# Altium PCB SteeringWheelSTM32F4.PcbDoc
Units mm, origin at the board's own origin, x right, y up, seen from the top; angles counter-clockwise.
Board outline 89 x 65 mm, 2 copper layers (Top Layer, Bottom Layer); 36 components, 33 nets, 212 pads, 45 vias.
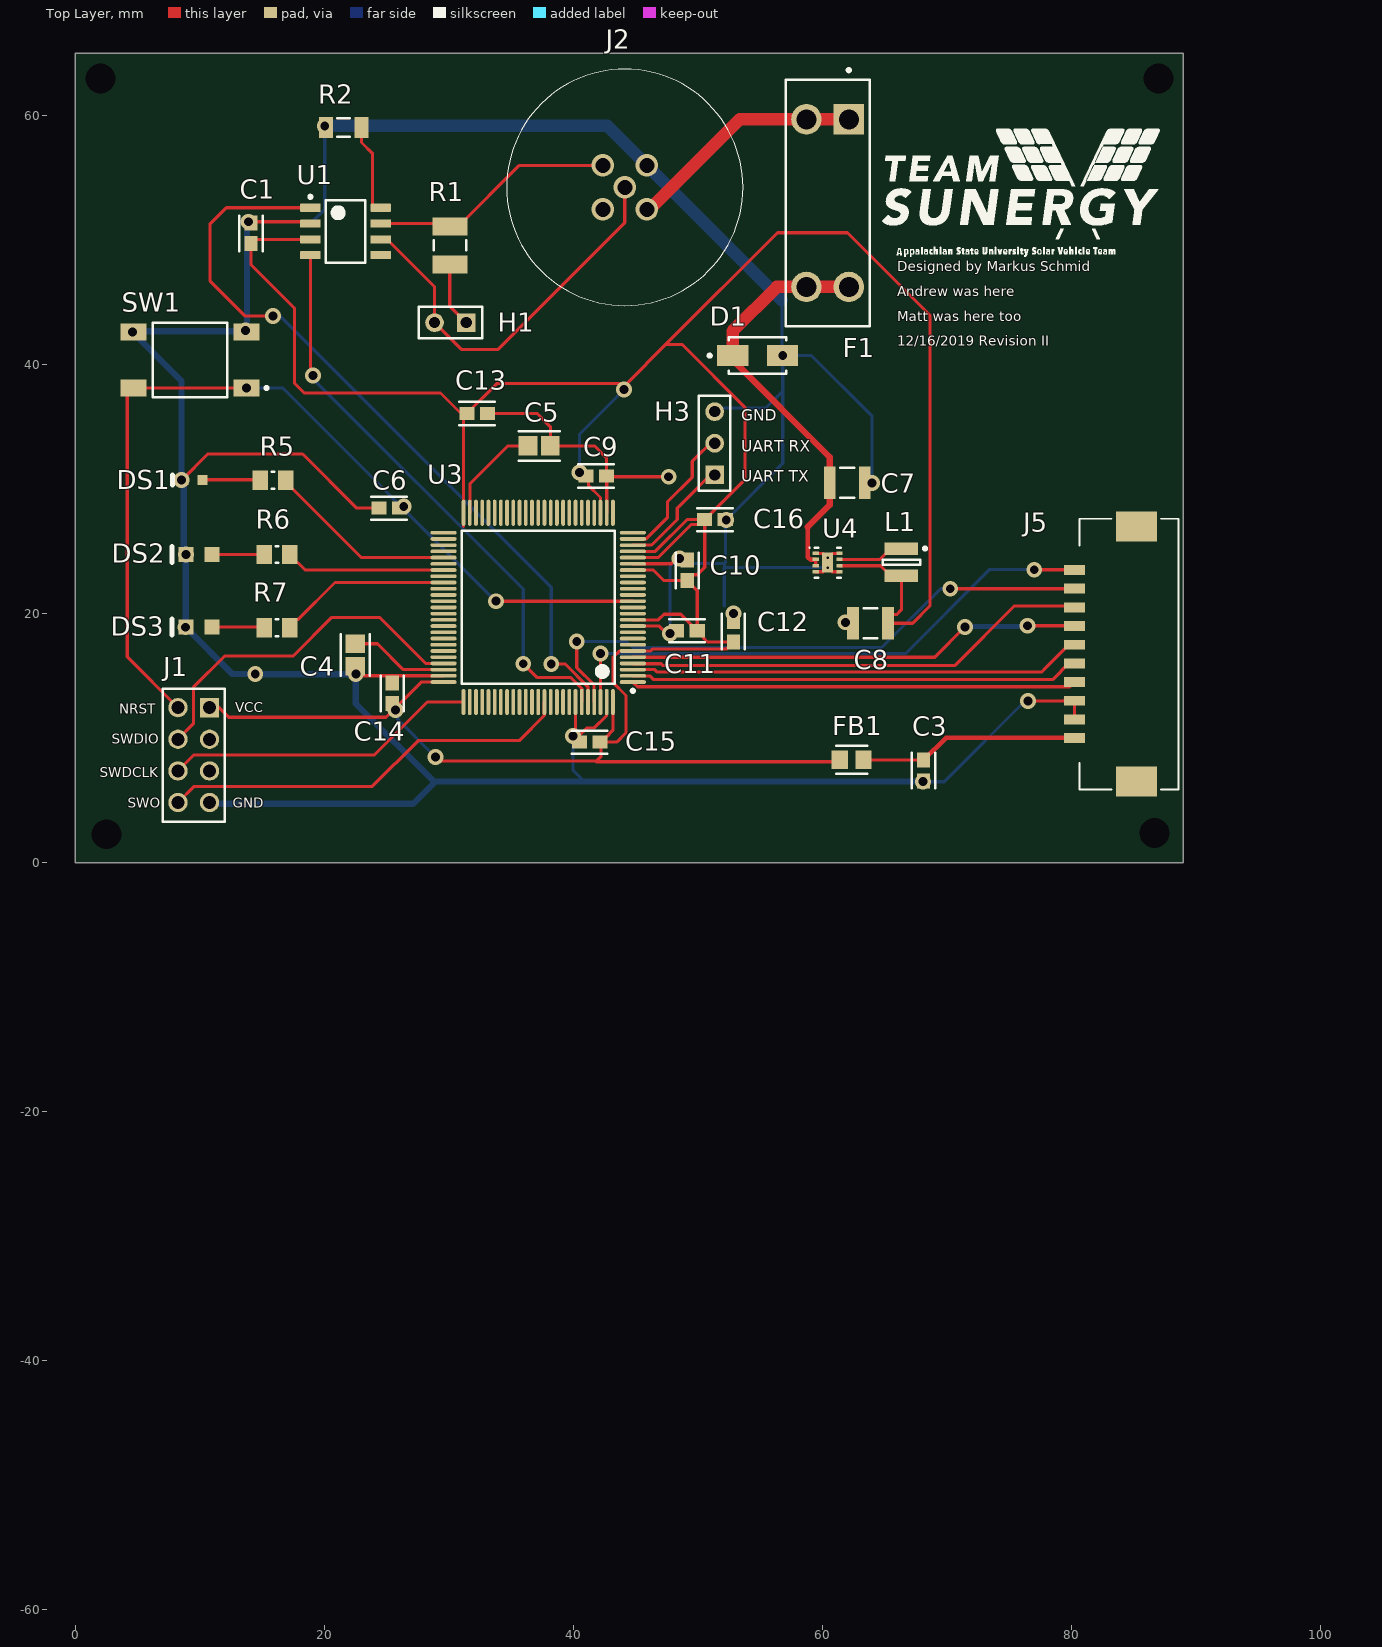
[diagram p0: Top Layer view]
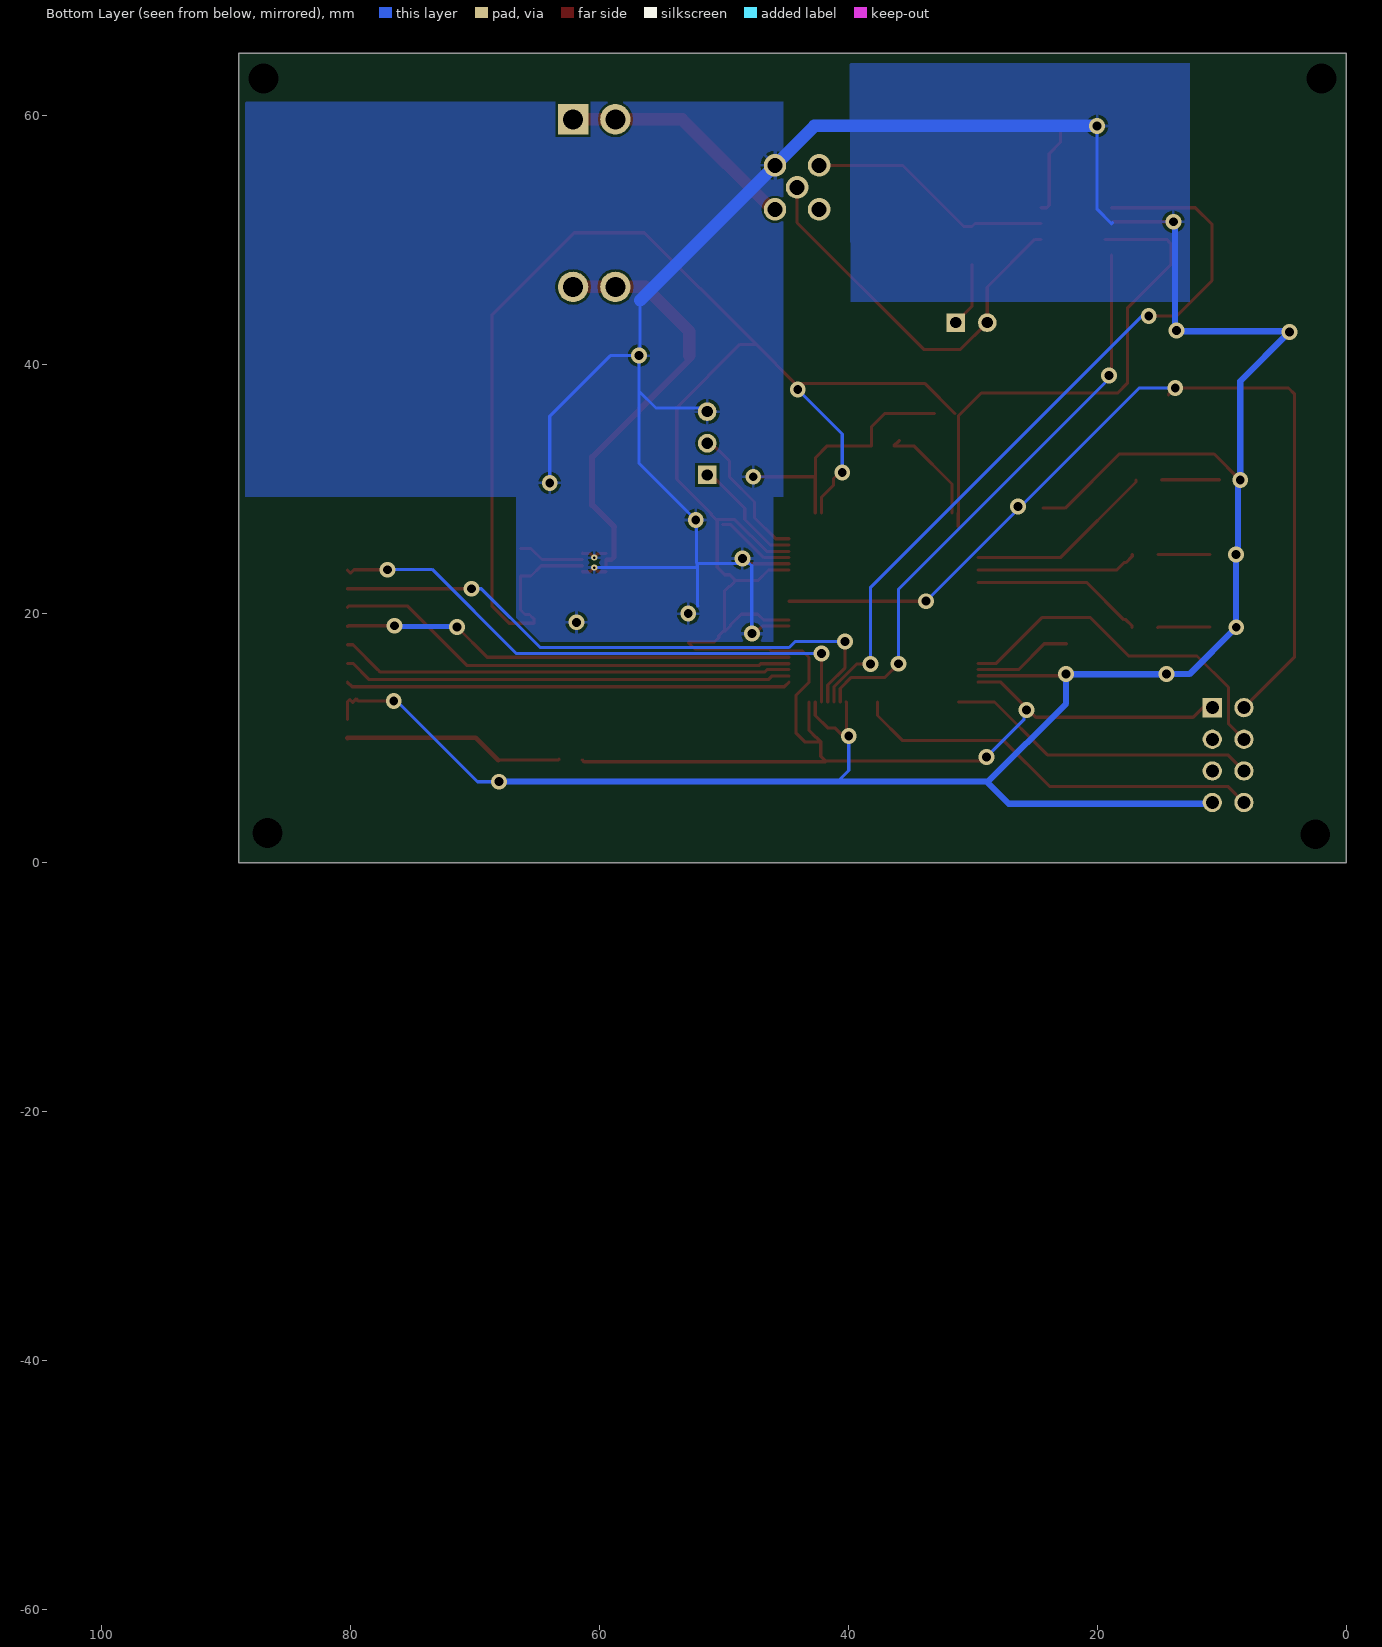
[diagram p1: Bottom Layer view, seen from below]

## Layer stack, top to bottom
Top Solder: solder mask 0.0102, Solder Resist, Dk 3.5
Top Layer: signal copper 0.0356
Dielectric 1: dielectric 0.32, FR-4, Dk 4.8
Bottom Layer: signal copper 0.0356
Bottom Solder: solder mask 0.0102, Solder Resist, Dk 3.5

## Board outline
0,0 0,65 89,65 89,0

## Design rules (kind name [scope] priority, off if disabled: settings)
Clearance [All] p1: gap=0.2 ignorepadtopadclearanceinfootprint=TRUE except(0: Arc-Hole Track-Hole SMDPad-Hole THPad-Hole Via-Hole Fill-Hole Poly-Hole Region-Hole Text-Hole)
MinimumSolderMaskSliver MinimumSolderMaskSliver_1 [HasFootprint('DSG8-1600X900TP') vs HasFootprint('DSG8-1600X900TP')] p1: minsoldermaskwidth=0
MinimumSolderMaskSliver [All] p2: minsoldermaskwidth=0.2
PolygonConnect [All] p1: connectstyle=Relief reliefconductorwidth=0.254 reliefentries=4 polygonreliefangle="90 Angle" airgapwidth=0.254
RoutingVias [All] p1: holewidth=0.711 width=1.27 viastyle="Through Hole" minholewidth=0.711 minwidth=1.27 maxholewidth=0.711 maxwidth=1.27
SilkToSolderMaskClearance [IsPad] p1: minsilkscreentomaskgap=0.2 clearancetoexposedcopper=TRUE
SolderMaskExpansion [All] p1: expansion=0.102
Width [All] p1: maxlimit=1 minlimit=0.254 preferedwidth=0.254 minimp=50.000000 maximp=50.000000 favimp=50.000000
28 further rules are at their usual default settings.

## Classes and differential pairs
net class Power: +12 NetF1_1
component class User_LEDs: DS1 DS2 DS3 R5 R6 R7
component class Power_Supply: C7 C8 C9 C10 C11 C12 C13 C14 C15 C16 L1 U4
component class MCU: "C1 0.1 uF" C4 C5 "C5 100nF" C6 "C6 100nF" "C7 100nF" "C8 0.1uF" "C9 0.1uF" "C10 0.1uF" SW1 U3
component class Communications: C1 D1 F1 H1 H3 J1 J2 R1 R2 U1
component class Connector: C3 FB1 J5

## Components (designator, comment, footprint, x,y, rotation, side; value= is the part's Value field where it differs from the comment)
C1 "100nF" Kemet_C0603_IPC_A 14.1,50.551 r90 top
C3 "C0603C104K5RACTU" Kemet_C0603_IPC_A 68.125,7.399 r270 top
C4 "2.2uF" Yageo_CC0805-0.85_IPC_A 22.475,16.675 r90 top
C5 "2.2uF" Yageo_CC0805-0.85_IPC_A 37.25,33.475 r180 top
C6 "100nF" Kemet_C0603_IPC_A 25.2,28.475 r180 top
C7 "CAP 22uF 16V X7R 1210(3225)" CAPC1210(3225)280_L 62,30.5 r180 top value=22uF
C8 "CAP 22uF 16V X7R 1210(3225)" CAPC1210(3225)280_L 63.875,19.225 r0 top value=22uF
C9 "100nF" Kemet_C0603_IPC_A 41.825,31.058 r180 top
C10 "100nF" Kemet_C0603_IPC_A 49.15,23.475 r270 top
C11 "100nF" Kemet_C0603_IPC_A 49.125,18.625 r0 top
C12 "100nF" Kemet_C0603_IPC_A 52.85,18.55 r270 top
C13 "100nF" Kemet_C0603_IPC_A 32.275,36.075 r0 top
C14 "100nF" Kemet_C0603_IPC_A 25.45,13.6 r90 top
C15 "100nF" Kemet_C0603_IPC_A 41.3,9.675 r180 top
C16 "100nF" Kemet_C0603_IPC_A 51.374,27.55 r180 top
D1 "S1J-13-F" Diodes_SMA_0 54.8,40.725 r0 top
DS1 "HSMS-C190" AVAG-HSMX-C190_V 9.45,30.75 r180 top
DS2 "HSMD-C170" AVAG-HSMX-C170_V 9.925,24.75 r180 top
DS3 "HSMG-C170" AVAG-HSMX-C170_V 9.925,18.925 r180 top
F1 "3557-2" Keystone_3557-2_0 60.425,52.975 r270 top
FB1 "2508056017Y2" Fair-Rite_250805_0 62.35,8.25 r0 top
H1 "Header 0" HDR1X2 31.39,43.375 r180 top
H3 "Header 3" HDR1X3 51.35,31.145 r90 top
J1 "SSW-104-02-T-D" SMTC-SSW-104-02-X-D 10.775,12.445 r270 top
J2 "1542761" 1542761 44.132,54.243 r45 top
J5 "Part Number: 1-292227-0" CON10_1X10_DRH_H 80.25,23.5 r270 top value=Value
L1 "SRN3015-2R2M" BOUR-SRN3015-2_V 66.35,24.125 r270 top
R1 "ERJ-14YJ121U" RESC3225X70X50ML20T20 30.075,49.575 r270 top
R2 "ERJ-8GEYJ103V" RESC3216X70X50NL05T20 21.55,59.05 r180 top
R5 "CRCW0805165RFKEA" RESC2013X50X30ML20T20 15.875,30.725 r0 top
R6 "CRCW0805165RFKEA" RESC2013X50X30ML20T20 16.175,24.75 r0 top
R7 "CRCW0805165RFKEA" RESC2013X50X30ML20T20 16.2,18.875 r0 top
SW1 "TL3301AF260QG" ESWI-TL3301AF260QG_V 9.2,40.375 r180 top
U1 "SN65HVD230D" D0008A_M 21.7,50.7 r0 top
U3 "STM32F407VGT6" STM-LQFP100_M 37.175,20.5 r180 top
U4 "TPS62172DSGR" DSG8-1600X900TP 60.425,24.1 r0 top

## Footprints (in the part's own frame and the unit in brackets; to place one, negate y for a bottom-side part, rotate by r counter-clockwise, add the part's x,y. Pads: shape width x height; smd on the part's side, far side on the other; paste and mask are expansions set on the pad)
1542761 [mm]
  round 1.8 hole 1.2: 1(-2.5,0) 2(0,-2.5) 3(2.5,0) 4(0,2.5) 5(0,0)
  silkscreen extent -9.5,-9.5 9.5,9.5
AVAG-HSMX-C170_V [mm] "SMD, 2-Leads, Body 2x1.25mm, Height 0.8mm"
  rect 1.2x1.2 smd: 1(-1.05,0) 2(1.05,0)
  silkscreen extent 2.15,-0.63 2.15,0.63, body extent -1,-0.63 1,0.63, height 0.8
AVAG-HSMX-C190_V [mm] "SMD, 2-Leads, Body 1.6x0.8mm, Height 0.9mm"
  rect 0.8x0.8 smd: 1(-0.75,0) 2(0.75,0)
  silkscreen extent 1.65,-0.4 1.65,0.4, body extent -0.8,-0.4 0.8,0.4, height 0.9
BOUR-SRN3015-2_V [mm] "SMD, 2-Leads, Body 3x3mm, Height 1.5mm"
  rect 1x2.7 smd: 1(-1.1,0) 2(1.1,0)
  silkscreen extent -1.22,-1.5 0.2,2.03, body extent -1.5,-1.5 1.5,1.5, height 1.5
CAPC1210(3225)280_L [mm] "Chip Capacitor, Body 3.2x2.5mm, Height 2.8mm, IPC High Density"
  rect 0.95x2.6 smd: 1(-1.4,0) 2(1.4,0)
  silkscreen extent -0.55,-1.2 0.55,1.2, body extent -1.7,-1.4 1.7,1.4, height 2.8
CON10_1X10_DRH_H [mm]
  rect 0.8x1.7 smd: 1(0,0) 2(1.5,0) 3(3,0) 4(4.5,0) 5(6,0) 6(7.5,0) 7(9,0) 8(10.5,0) 9(12,0) 10(13.5,0)
  rect 2.413x3.302 smd: 11(-3.499,4.978) 12(16.999,4.978)
  silkscreen extent -4.12,0.41 17.62,8.36, body extent 0,0 0.25,0.25, height 0.25
D0008A_M [mm] "SOIC, 8-Leads, Body 5x4mm, Pitch 1.27mm, IPC Low Density"
  rrect15% 1.65x0.65 smd: 1(-2.825,1.905) 2(-2.825,0.635) 3(-2.825,-0.635) 4(-2.825,-1.905) 5(2.825,-1.905) 6(2.825,-0.635) 7(2.825,0.635) 8(2.825,1.905)
  silkscreen extent -2.95,-2.5 1.6,2.9, body extent -3,-2.45 3,2.45, height 1.63
Diodes_SMA_0 [mm]
  rect 2.5x1.7 smd paste+0 mask+0: 1(-2,0) 2(2,0)
  silkscreen extent -3.97,-1.46 2.3,1.46, body extent -3.35,-1.56 3.35,1.56, height 0.25
DSG8-1600X900TP [mm] "SON, 8-Leads, Body 2x2mm, Pitch 0.5mm, Thermal Pad 1.6x0.9mm, TI Recommended"
  rect 0.5x0.28 smd paste-0.14 mask+0.07: 1(-0.95,0.75) 2(-0.95,0.25) 3(-0.95,-0.25) 4(-0.95,-0.75) 5(0.95,-0.75) 6(0.95,-0.25) 7(0.95,0.25) 8(0.95,0.75)
  rect 0.9x1.6 smd paste-0.45 mask+0.07: 9(0,0)
  silkscreen extent -1.5,-1.2 1.05,1.25, body extent -1.05,-1.05 1.05,1.05, height 0.8
ESWI-TL3301AF260QG_V [mm] "SMD, 4-Leads, Body 6x6mm"
  rect 2.1x1.4 smd: 1(-4.55,2.25) 2(4.55,2.25) 3(-4.55,-2.25) 4(4.55,-2.25)
  silkscreen extent -6.27,-3 3,3, body extent -3,-3 3,3, height 5.3
Fair-Rite_250805_0 [mm]
  rect 1.3x1.5 smd paste+0 mask+0: 1(-0.95,0) 2(0.95,0)
  silkscreen extent -1.25,-1.12 1.25,1.13
HDR1X2 [mm] "Connector; Header; 2 Position"
  rect 1.5x1.5 hole 0.9: 1(0,0)
  round 1.5 hole 0.9: 2(2.54,0)
  silkscreen extent -1.27,-1.27 3.81,1.27
HDR1X3 [mm] "Connector; Header; 3 Position"
  rect 1.5x1.5 hole 0.9: 1(0,0)
  round 1.5 hole 0.9: 2(2.54,0) 3(5.08,0)
  silkscreen extent -1.27,-1.27 6.35,1.27
Kemet_C0603_IPC_A [mm]
  rect 1.206x1.058 smd paste+0 mask+0: 1(-0.826,0) 2(0.826,0)
  silkscreen extent -1.43,-0.93 1.43,0.93
Keystone_3557-2_0 [mm]
  rect 2.45x2.45 hole 1.6 paste-1000 mask+0: 1(-6.735,1.7)
  round 2.45 hole 1.6 paste-1000 mask+0: 2(6.735,1.7) 3(-6.735,-1.7) 4(6.735,-1.7)
  silkscreen extent -10.8,-3.36 9.9,3.36, body extent -10.08,-3.54 10.08,3.54, height 0.25
RESC2013X50X30ML20T20 [mm] "Chip Resistor, 2-Leads, Body 2.00x1.25mm, IPC Low Density"
  rect 1.25x1.55 smd: 1(-1.025,0) 2(1.025,0)
  silkscreen extent -0.1,-0.68 0.1,0.67, body extent -1.1,-0.73 1.1,0.73, height 0.5
RESC3216X70X50NL05T20 [mm] "Chip Resistor, 2-Leads, Body 3.20x1.60mm, IPC Medium Density"
  rect 1.1x1.65 smd: 1(-1.425,0) 2(1.425,0)
  silkscreen extent -0.5,-0.72 0.5,0.73, body extent -1.63,-0.82 1.62,0.82, height 0.7
RESC3225X70X50ML20T20 [mm] "Chip Resistor, 2-Leads, Body 3.20x2.50mm, IPC Low Density"
  rect 1.45x2.8 smd: 1(-1.525,0) 2(1.525,0)
  silkscreen extent -0.4,-1.3 0.4,1.3, body extent -1.7,-1.35 1.7,1.35, height 0.7
SMTC-SSW-104-02-X-D [mm] "SQ Post Socket, 2x4 Pins, Vertical, 2.54mm Pitch, Female"
  rect 1.55x1.55 hole 1.04: 1(0,0)
  round 1.55 hole 1.04: 2(0,-2.54) 3(2.54,0) 4(2.54,-2.54) 5(5.08,0) 6(5.08,-2.54) 7(7.62,0) 8(7.62,-2.54)
  silkscreen extent -1.52,-3.75 9.15,1.2, body extent -1.52,-3.75 9.14,1.21, height 8.51
STM-LQFP100_M [mm] "Thin QFP, 100-Leads, Body 14x14mm, Pitch 0.5mm, IPC Low Density"
  oval 2.1x0.3 smd: 1(-7.6,6) 2(-7.6,5.5) 3(-7.6,5) 4(-7.6,4.5) 5(-7.6,4) 6(-7.6,3.5) 7(-7.6,3) 8(-7.6,2.5) 9(-7.6,2) 10(-7.6,1.5) 11(-7.6,1) 12(-7.6,0.5) 13(-7.6,0) 14(-7.6,-0.5) 15(-7.6,-1) 16(-7.6,-1.5) 17(-7.6,-2) 18(-7.6,-2.5) 19(-7.6,-3) 20(-7.6,-3.5) 21(-7.6,-4) 22(-7.6,-4.5) 23(-7.6,-5) 24(-7.6,-5.5) 25(-7.6,-6) 51(7.6,-6) 52(7.6,-5.5) 53(7.6,-5) 54(7.6,-4.5) 55(7.6,-4) 56(7.6,-3.5) 57(7.6,-3) 58(7.6,-2.5) 59(7.6,-2) 60(7.6,-1.5) 61(7.6,-1) 62(7.6,-0.5) 63(7.6,0) 64(7.6,0.5) 65(7.6,1) 66(7.6,1.5) 67(7.6,2) 68(7.6,2.5) 69(7.6,3) 70(7.6,3.5) 71(7.6,4) 72(7.6,4.5) 73(7.6,5) 74(7.6,5.5) 75(7.6,6)
  oval 0.3x2.1 smd: 26(-6,-7.6) 27(-5.5,-7.6) 28(-5,-7.6) 29(-4.5,-7.6) 30(-4,-7.6) 31(-3.5,-7.6) 32(-3,-7.6) 33(-2.5,-7.6) 34(-2,-7.6) 35(-1.5,-7.6) 36(-1,-7.6) 37(-0.5,-7.6) 38(0,-7.6) 39(0.5,-7.6) 40(1,-7.6) 41(1.5,-7.6) 42(2,-7.6) 43(2.5,-7.6) 44(3,-7.6) 45(3.5,-7.6) 46(4,-7.6) 47(4.5,-7.6) 48(5,-7.6) 49(5.5,-7.6) 50(6,-7.6) 76(6,7.6) 77(5.5,7.6) 78(5,7.6) 79(4.5,7.6) 80(4,7.6) 81(3.5,7.6) 82(3,7.6) 83(2.5,7.6) 84(2,7.6) 85(1.5,7.6) 86(1,7.6) 87(0.5,7.6) 88(0,7.6) 89(-0.5,7.6) 90(-1,7.6) 91(-1.5,7.6) 92(-2,7.6) 93(-2.5,7.6) 94(-3,7.6) 95(-3.5,7.6) 96(-4,7.6) 97(-4.5,7.6) 98(-5,7.6) 99(-5.5,7.6) 100(-6,7.6)
  silkscreen extent -7.73,-6.15 6.15,6.82, body extent -7,-7 7,7, height 1.6
Yageo_CC0805-0.85_IPC_A [mm]
  rect 1.505x1.556 smd paste+0 mask+0: 1(-0.901,0) 2(0.901,0)
  silkscreen extent -1.65,-1.18 1.65,1.18, body extent -2.15,-1.28 2.15,1.28, height 0.25

## Part data
C1 C6 C9 C10 C11 C12 C13 C14 C15 C16: library part C0603C104K5RACTU, "CAP CER 0.1UF 100NF 50V X7R 0603 C0603C104K5RACTU"
C4: library part CC0805KKX7R6BB225, "2.2UF CC0805KKX7R6BB225", Case/Package=0805, Case Code (Metric)=2012, Dielectric=X7R, Dielectric Material=Ceramic, Manufacturer 1=Yageo, Max Operating Temperature=125°C, Min Operating Temperature=-55°C, Package Quantity=1, Supplier Part Number 1=311-1368-1-ND, Tolerance=10%, Voltage Rating=10V, Capacitance=2.2uF, Case Code (Imperial)=0805, ComponentLink1Description=https://datasheet.ciiva.com/5789/1734573-5789888.pdf?src-supplier=Farnell, ComponentLink1URL=https://datasheet.ciiva.com/5789/1734573-5789888.pdf?src-supplier=Farnell, ComponentLink2Description=https://datasheet.ciiva.com/161/mlccorderingcode-161925.pdf?src-supplier=Digi-Key, ComponentLink2URL=https://datasheet.ciiva.com/161/mlccorderingcode-161925.pdf?src-supplier=Digi-Key, ComponentLink3Description=https://datasheet.ciiva.com/15189/getdatasheetpartid-315916-15189205.pdf?src-supplier=Verical, ComponentLink3URL=https://datasheet.ciiva.com/15189/getdatasheetpartid-315916-15189205.pdf?src-supplier=Verical, ComponentLink4Description=https://datasheet.ciiva.com/161/mlccorderingcode-161926.pdf?src-supplier=Digi-Key, ComponentLink4URL=https://datasheet.ciiva.com/161/mlccorderingcode-161926.pdf?src-supplier=Digi-Key, ComponentLink5Description=https://datasheet.ciiva.com/161/mlccorderingcode-161927.pdf?src-supplier=Digi-Key, ComponentLink5URL=https://datasheet.ciiva.com/161/mlccorderingcode-161927.pdf?src-supplier=Digi-Key, ComponentLink6Description=https://datasheet.ciiva.com/8033/70765-8033975.pdf?src-supplier=Element14, ComponentLink6URL=https://datasheet.ciiva.com/8033/70765-8033975.pdf?src-supplier=Element14, ComponentLink7Description=https://datasheet.ciiva.com/8033/1734573-8033977.pdf?src-supplier=Element14, ComponentLink7URL=https://datasheet.ciiva.com/8033/1734573-8033977.pdf?src-supplier=Element14, ComponentLink8Description=https://datasheet.ciiva.com/13208/upy-gphc-x7r-6-3v-to-50v-8-12304-13208665.pdf?src-supplier=Mouser, ComponentLink8URL=https://datasheet.ciiva.com/13208/upy-gphc-x7r-6-3v-to-50v-8-12304-13208665.pdf?src-supplier=Mouser, ComponentLink9Description=https://datasheet.ciiva.com/8033/1734573-8033979.pdf?src-supplier=Element14, ComponentLink9URL=https://datasheet.ciiva.com/8033/1734573-8033979.pdf?src-supplier=Element14, ComponentLink10Description=https://datasheet.ciiva.com/16624/upy-gphc-x7r-6-3v-to-50v-8-16624651.pdf?src-supplier=Avnet+Europe, ComponentLink10URL=https://datasheet.ciiva.com/16624/upy-gphc-x7r-6-3v-to-50v-8-16624651.pdf?src-supplier=Avnet+Europe, ComponentLink11Description=https://datasheet.ciiva.com/11587/upy-gphc-x7r-6-3v-to-50v-8-11587213.pdf?src-supplier=Avnet, ComponentLink11URL=https://datasheet.ciiva.com/11587/upy-gphc-x7r-6-3v-to-50v-8-11587213.pdf?src-supplier=Avnet, Composition=Ceramic, Depth=1.25mm, Halogen Free="Halogen Free", Height=1.25mm, Lead Free="Lead Free", Length=2mm, Manufacturer Part Number 1=CC0805KKX7R6BB225, Mount="Surface Mount", Packaging="Tape and Reel", Pricing 1="1=0.25000, 10=0.17200, 100=0.09760, 500=0.06890, 1000=0.06029 (USD)", Radiation Hardening=No, REACH SVHC=Unknown, RoHS=Yes, Stock 1=101677, Supplier 1=Digi-Key, Termination=SMD/SMT, Thickness=0.049inch, Voltage Rating (DC)=10V, Weight=0.000194oz, Width=0.049inch
C5: library part CC0805KKX7R6BB225, "2.2UF CC0805KKX7R6BB225"
C7 C8: library part CMP-1038-02277-1, "CAP 22uF 16V ±10% 1210 (3225 Metric) Thickness 2.8mm SMD", Case-EIA=1210, Case-Metric=3225, Rated Voltage="16 V", Tolerance=±10%, Max Thickness="2.8 mm", Technology=SMT
DS1: library part CMP-2000-06427-1, "LED Uni-Color Red, 52 mW, 20 mA, -40 to 85 degC, 2-Pin SMD, RoHS, Tape and Reel", Emitting Color=Red, Forward Current=25mA, Forward Voltage=2.6V, Manufacturer=Avago, Operating Temperature Classification=Industrial, Operating Temp Range=-40Cto85C, Package Description="2-Pin Surface Mount Device, Body 1.6 x 0.8 mm, Height 0.9 mm", Package Reference=HSMX-C190, Package Type=ChipLed, Power Dissipation=52W, Reverse Voltage=5V, Test Current (It)=20mA, Chip Material=GaP, Datasheet URL=http://docs.avagotech.com/docs/AV02-0551EN, Datasheet Version=03/2012, DELETED=Compliant, Dominant Wave Length=626nm, High Brightness=No, Lens Dimensions=1x0.8x0.5mm, Lens Type=ColorlessDiffused, Luminous Intensity=10mcd, Lum Intensity=10mcd, Main Category=ChipLED, Manufacturer URL=http://www.avagotech.com/, Mounting=SurfaceMount, Mounting Technology=SurfaceMount, Number of  Elements=1, Packaging=TapeandReel, Peak Wavelength=630nm, Pin Count=2, Product Depth (mm)=0.8mm, Product Height (mm)=0.8mm, Product Length (mm)=1.6mm, Rad Hardened=No, Shape Type=Rectangular, Type=Uni-Color, Viewing Angle=170deg
DS2: library part CMP-2000-06421-1, "LED Uni-Color Orange, 52 mW, 20 mA, -40 to 85 degC, 2-Pin SMD, RoHS, Tape and Reel", Forward Current If=20mA, Forward Voltage=2.2V, LED Colour=Orange, Manufacturer=Avago, Operating Temperature Max=85°C, Operating Temperature Min=-30°C, Operating Temperature Range=-30°Cto+85°C, Opto Case Style=SMD, Package Description="2-Pin Surface Mount Device, Body 2 x 1.25 mm, Height 0.8 mm", Package Reference=HSMX-C170, Power Dissipation Pd=52mW, Storage Temperature Min=-40°C, Bulb Size=1.25mmx1.4mm, Datasheet URL=http://docs.avagotech.com/docs/AV02-0551EN, Datasheet Version=03/2012, Dominant Wavelength=604nm, External Depth=0.8mm, External Length / Height=2mm, External Width=1.25mm, Forward Current If Max=20mA, Forward Voltage VF Max=2.2V, LED Mounting=SMD, LED Type=Standard, Lens Shape=Rectangular, Light Area Height=1.25mm, Luminous Intensity=8mcd, Luminous Intensity Typ=8mcd, Manufacturer URL=http://www.avagotech.com/, Mounting Technology=SurfaceMount, Mounting Type=SMD, MSL=MSL2A-4weeks, No. of Pins=2, Opto Mounting Orientation=Top, Package / Case=SMD, Peak Forward Current=20mA, Peak Wavelength=605nm, PIV Max=5V, Storage Temperature Max=85°C, SVHC=NoSVHC(19-Dec-2012), Viewing Angle=170°, Voltage Vf Typ=2.2V, Wavelength Typ=605nm
DS3: library part CMP-2000-05062-1, "Chip LED, Green, 2.2 V, -40 to 85 degC, 2-Pin SMD, Pb-Free, Tape and Reel", Forward Current If=20mA, Forward Voltage=2.2V, Forward Voltage VF Max=2.6V, LED Colour=Green, Manufacturer=Avago, Operating Temperature Max=85degC, Operating Temperature Min=-30degC, Operating Temperature Range=-30degCto+85degC, Opto Case Style=SMD, Package Description="2-Pin Surface Mount Device, Body 2 x 1.25 mm, Height 0.8 mm", Package Reference=HSMX-C170, Storage Temperature Min=-40degC, Bulb Size=1.25mmx1.4mm, Datasheet URL=https://datasheet.ciiva.com/29280/180495-da-01-en-chip-led-hsmg-c170-gelb-gruen-29280971.pdf, Datasheet Version=Oct-08, Dominant Wavelength=572nm, Dominant Wavelength Typ=572nm, External Depth=0.8mm, External Length / Height=2mm, External Width=1.25mm, Forward Current If Max=20mA, LED Mounting=SMD, LED Type=Standard, Lens Shape=Rectangular, Light Area Height=1mm, Luminous Intensity=15mcd, Luminous Intensity Min=4mcd, Luminous Intensity Typ=15mcd, Manufacturer URL=http://www.avagotech.com/, Mounting Type=SMD, MSL=MSL2A-4weeks, No. of Pins=2, Opto Mounting Orientation=Top, Packaging=CutTape, Peak Forward Current=20mA, Peak Wavelength=570nm, PIV Max=5V, Storage Temperature Max=85degC, SVHC=NoSVHC(16-Jun-2014), Viewing Angle=170deg, Voltage Vf Typ=2.2V, Wavelength Typ=570nm
H1: library part "Header 2", "Header, 2-Pin", LatestRevisionDate=17-Jul-2002, LatestRevisionNote="Re-released for DXP Platform.", Publisher="Altium Limited"
H3: "Header, 3-Pin", LatestRevisionDate=17-Jul-2002, LatestRevisionNote="Re-released for DXP Platform.", Publisher="Altium Limited"
J1: library part CMP-1023-00342-1, "SQ Post Socket, Through-hole, Vertical, -55 to 105 degC, 2.54mm Pitch, 8-Pin, Female, RoHS", Manufacturer=Samtec, Temperature Range="-55 to 105 degC", ComponentLink1Description="Manufacturer URL", ComponentLink1URL=http://www.samtec.com, ComponentLink2Description=Datasheet, ComponentLink2URL=http://www.samtec.com/documents/webfiles/pdf/SSW_TH.PDF, ComponentLink3Description="Package Specification", ComponentLink3URL=http://www.samtec.com/documents/webfiles/cpdf/SSW-1XX-XX-XXX-X-XX-XXX-XX-MKT.pdf, DatasheetVersion=F-214, Mounting Technology=Through-hole, Orientation=Vertical, PackageDescription="Assembly, Socket Strip .016 X .031 Tail", PackageReference=SSW-104-02-X-D, PackageVersion="CA, 6/1987", PartNumber=SSW-104-02-T-D, Pitch="2.54 mm", RoHS=True
J2: "Connector", Manufacturer_Name="Phoenix Contact", Mouser Part Number=651-1542761, RS Part Number=8025583, Allied_Number=70170366, Allied Price/Stock=https://www.alliedelec.com/phoenixcontact-1542761/70170366/, Datasheet Link=https://media.digikey.com/PDF/Data%20Sheets/Phoenix%20Contact%20PDFs/1542761.pdf, Height=18mm, Manufacturer_Part_Number=1542761, Mouser Price/Stock=https://www.mouser.com/Search/Refine.aspx?Keyword=651-1542761, RS Price/Stock=http://uk.rs-online.com/web/p/products/8025583
J5: library part 1-292227-0, "No Description Available", Built_By=EMA_UL_Team, Copyright="Copyright (C) 2018 Accelerated Designs. All rights reserved", Manufacturer_Part_Number=1-292227-0, RefDes=RefDes, Type=DEV, Vendor="TE Connectivity"
L1: library part CMP-0007-00003-1, "Semi-shielded Power Inductor, 2.2 uH, +/- 20%, 1.8 A, -40 to 125 degC, 3 x 3 x 1.5 mm SMD, RoHS and Halogen Free, Tape and Reel", Inductance="2.2 uH", Inductance tolerance="+/- 20%", Manufacturer=Bourns, Operating Temperature="-40 to 125 degC", Rated current="1.8 A", Resistance to Solder Heat="+260 degC for 10 sec.", ComponentLink1Description="Manufacturer URL", ComponentLink1URL=http://www.bourns.com/, ComponentLink2Description=Datasheet, ComponentLink2URL=http://www.bourns.com/data/global/pdfs/SRN3015.pdf, ComponentLink3Description="Package Specification", ComponentLink3URL=http://www.bourns.com/data/global/pdfs/SRN3015.pdf, DatasheetVersion=Aug-11, DCR Max="0.072 Ohm", Isat="1.65 A", Mounting Technology="Surface Mount", PackageDescription="2-Pin SMD, Body 3 x 3 mm, Height 1.5 mm", PackageReference=SRN3015, Packing="Tape and Reel", PartNumber=SRN3015-2R2M, RoHS=TRUE, SRF Min="90 MHz"
R1: library part CMP-2005-03490-1, "120Ohm", Manufacturer=Panasonic, Part Number=ERJ-14YJ121U
R2: library part CMP-2003-00545-1, "10k", Manufacturer=Panasonic, Part Number=ERJ-8GEYJ103V
R5 R6 R7: library part CMP-2001-04978-1, Manufacturer="Vishay Dale", Part Number=CRCW0805165RFKEA
SW1: library part CMP-2000-07249-1, "Tactile Switch, SPST-NO, 50 mA, 12 V, -20 to 70 degC, 4-Pin SMD, RoHS, Tape and Reel", Contact Rating @ Voltage=0.05A@12VDC, Illumination Type, Color=-, Manufacturer=E-Switch, Operating Force=260gf, Operating Temperature=-20°C~70°C, Package Description="4-Pin Surface Mount Device, Body 6 x 6 mm", Package Version="Rev. D, 10/2014", Standard Package=1, 3D Model=TL3301AFyyyyG.stp, Actuator Height off PCB, from Pins=5.00mm, Actuator Material=Polyamide(PA),Nylon, Actuator Orientation=TopActuated, Actuator Type=Standard, Catalog Drawings=TL3301xFFootprint, Category=Switches, Circuit=SPST-NO, Datasheet URL=https://www.e-switch.com/system/asset/product_line/data_sheet/185/TL3301.pdf, Datasheet Version=12/2013, Family=TactileSwitches, Featured Product=TL3301SeriesTactSwitch, Features=-, Illumination=Non-Illuminated, Illumination Voltage (Nominal)=-, Ingress Protection=-, Manufacturer URL=http://www.e-switch.ch/en/, Mechanical Life=100,000Cycles, Mounting Technology=SurfaceMount, Mounting Type=SurfaceMount, Online Catalog=TL3301Series, Other Names=EG2527DKR, Outline=6.00mmx6.00mm, Package Reference=TL3301AF260QG, Package URL=http://spec_sheets.e-switch.com/specs/P010513.pdf, Packaging=Digi-Reel®, Product Training Modules=SwitchBasics, RoHS Information=TL3301SeriesRoHSCertofCompliance, Series=TL3301, Switch Function=Off-Mom, Switch Travel=0.25mm, Termination Style=GullWing
U1: library part CMP-0315-00046-3, "CAN Bus Transceiver, 3.3 V, -40 to 85 degC, 8-Pin SOIC (D), Green (RoHS & no Sb/Br), Tube", Generic Part Number=SN65HVD230, Supply Voltage Max="3.6 V", Supply Voltage Min="3 V", Temperature Max="85 degC", Temperature Min="-40 degC", ComponentLink1Description="Manufacturer URL", ComponentLink1URL=http://www.ti.com/, ComponentLink2Description=Datasheet, ComponentLink2URL="http://www.ti.com/general/docs/lit/getliterature.tsp?genericGeneric Part Number=SN65HVD230&fileType=pdf", DatasheetVersion=SLOS346N, Mounting Technology="Surface Mount", PackageDescription="8-Pin Plastic Small Outline, Body 4.9 x 3.9 mm, Pitch 1.27 mm", Packing=Tube, PartNumber=SN65HVD230D, RoHS=TRUE
U3: library part CMP-0243-00017-3, "ARM Cortex-M4 32-bit MCU+FPU, 210 DMIPS, 1024 kB Flash, 192 kB Internal RAM, 82 I/Os, 100-pin LQFP, -40 to 85 degC, Tray", I/Os (High Current)=82, Manufacturer=STMicroelectronics, Operating Frequency(F) (Processor speed) (MHz)=168, Supply Voltage(Vcc) max (V)=3.6, Supply Voltage(Vcc) min (V)=1.8, ComponentLink1Description="Manufacturer URL", ComponentLink1URL=http://www.st.com/web/en/home.html, ComponentLink2Description=Datasheet, ComponentLink2URL=http://www.st.com/st-web-ui/static/active/en/resource/technical/document/datasheet/DM00037051.pdf, ComponentLink3Description="Package Specification", ComponentLink3URL=http://www.st.com/st-web-ui/static/active/en/resource/technical/document/data_brief/DM00071938.pdf, Core="ARM Cortex-M4", D/A Converter=2x12-bit, DatasheetVersion="Rev. 4", FLASH Size (Prog) (kB)=1024, Internal RAM Size (kB)=192, Mounting Technology="Surface Mount", PackageDescription="100-Pin Low Profile Quad Flat Package, 14 x 14 mm Body, 0.5 mm Pitch", PackageReference=LQFP100, PackageVersion="Rev. 1, 06/2013", Packing=Tray, PartNumber=STM32F407VGT6
U4: "Buck Step Down Regulator with 3 to 17 V Input and 3.3 V Output, -40 to 85 degC, 8-Pin WSON (DSG), Green (RoHS & no Sb/Br)", Manufacturer="Texas Instruments", Rating=Catalog, Switch Current Limit(Typ)(A)=1.05, Code_JEDEC=MO-229, ComponentLink1Description=Datasheet, ComponentLink1URL=http://www.ti.com/general/docs/lit/getliterature.tsp?genericPartNumber=TPS62172&fileType=pdf, ComponentLink2Description="Package Specification", ComponentLink2URL=http://www.ti.com/litv/pdf/mpds308a, ComponentLink3Description="URL Link1", ComponentLink3URL="Samples URL:http://www.ti.com/product/tps62172#samples", DatasheetVersion=SLVSAT8A, Duty Cycle(Max)(%)=100, Eco-Plan="Green (RoHS & no Sb/Br)", Iout(Max)(A)=0.5, Iq(Typ)(mA)=0.017, Mounting Technology="Surface Mount", PackageDescription="8-Pin Plastic Small Outline No-Lead, 2 x 2 x 0.8 mm Body, 0.5 mm Pitch, Exposed Pad", PackageReference=DSG8-1600X900TP, PackageVersion="revB, Oct-2010", PartNumber=TPS62172DSGR, Preset Vout(V)=3.3, Regulated Outputs(#)=1, SubFamily="Step-Down Regulator", Synchronous Rectification=TRUE, Topology=Buck, Vin(Max)(V)=17, Vin(Min)(V)=3, Vout(Max)(V)=3.3, Vout(Min)(V)=3.3

## Free pads (board coordinates)
  round 1.524 hole 2.4: 1(2,63) 1(2.5,2.275) 1(86.675,2.375) 1(87,63) 1(100.9,-57.6)

## Via types
v1: diameter 1.27, hole 0.711, Top Layer to Bottom Layer, 38 vias
v2: diameter 1.8, hole 1.2, Top Layer to Bottom Layer, 5 vias
v3: diameter 0.5, hole 0.2, Top Layer to Bottom Layer, 2 vias

## Nets (pads, with @x,y where several pads share a name; then routed paths per layer and width w, separated by ;. In a path a pad name is that pad's centre, name@x,y a point inside that pad or via, vN(x,y) a via of type N, cw(c..) or ccw(c..) an arc to the next point about the centre after c; other vN are vias at no path point)
+12: C7.2 D1.1 F1.2 F1.4 U4.2 U4.3 | length 34.1
  Top Layer w0.254: U4.2@59.462,24.363 U4.2 U4.3
  Top Layer w0.381: D1.1@52.8,40.375 D1.1 ; 58.834,26.966 58.834,24.548 59.063,24.32 U4.2@59.415,24.32
  Top Layer w0.5: D1.1@52.8,40.375 60.6,32.575 C7.2 60.6,28.732 58.834,26.966
  Top Layer w1: D1.1 52.8,42.7 56.34,46.24 F1.4 F1.2
GND: C1.2 C3.2 C4.1 C5.1 C6.2 C7.1 C8.1 C9.1 C10.1 C11.1 C12.1 C13.2 C14.2 C15.2 C16.1 D1.2 DS1.2 DS2.2 DS3.2 H3.3 J1.7 J2.3 J5.8 J5.9 R2.2 SW1.3 SW1.4 U1.2 U3.10 U3.20 U3.27 U3.74 U3.94 U3.99 U4.1 U4.4 U4.5 U4.8 U4.9 | length 338.7
  Top Layer w0.254: v1(8.525,30.725) 10.625,32.825 18.25,32.825 22.6,28.475 C6.2 ; DS2.2@8.8,24.675 v1(8.875,24.75) DS2.2@8.975,24.85 ; v1(13.9,51.475) 18.735,51.475 U1.2 ; v1@22.375,15.009 29.566,15.009 U3.74 ; C13.2 37.1,36.075 38.151,35.024 C5.1 40.275,33.475 41.7,33.475 42.651,32.524 C9.1 C9.1@42.675,31.034 ; U3.94@40.166,12.909 U3.94 40.166,12.891 40.166,10.366 v1(39.975,10.175) 40.45,10.175 41.1,10.825 41.674,10.825 42.666,11.817 42.666,12.891 U3.99 ; U3.27 C9.1@42.675,31.034 ; U3.20@44.766,24.009 U3.20 47.868,24 48.293,24.425 v1(48.525,24.425) ; U3.10 46.913,19 47.513,18.4 v1(47.75,18.4) ; v1(47.655,30.998) 42.711,30.998 C9.1@42.675,31.034 ; D1.2@56.4,40.725 D1.2 ; U4.4 59.488,23.363 60.088,23.363 v3(60.425,23.7) 60.762,23.363 61.362,23.363 U4.5 U4.5@61.375,23.383 ; U4.1 59.488,24.837 60.088,24.837 v3(60.425,24.5) 60.762,24.837 61.362,24.837 U4.8 ; C3.2@68.1,6.548 C3.2 ; v1(76.525,12.975) 79.375,12.975 79.55,13.15 79.825,12.875 80.05,13.1 80.25,12.9 J5.9
  Bottom Layer w0.254: v1(4.575,42.625) v1@4.637,42.687 ; v1(8.525,30.725) v1@8.7,30.55 ; v1@8.7,24.925 v1(8.875,24.75) v1@8.862,24.738 ; v1(8.85,18.9) v1@8.862,18.912 ; v1@13.587,42.687 v1(13.65,42.75) v1@13.775,42.875 ; v1@13.775,51.35 v1(13.9,51.475) ; 18.8,51.4 18.875,51.325 20.025,52.475 v1(20.025,59.175) ; v1@22.412,15.137 22.425,15.15 v1(22.525,15.15) ; 28.85,6.45 28.875,6.475 ; v1(39.975,10.175) 39.975,7.4 40.825,6.55 ; v1(47.75,18.4) 47.775,18.425 47.775,23.85 47.95,24.025 ; v1(48.525,24.425) 48.35,24.425 47.95,24.025 ; 50.537,6.512 50.525,6.525 51.95,6.525 ; H3.3@51.3,36.515 55.465,36.515 56.825,37.875 ; 52.1,20.6 52.125,20.625 52.125,23.7 ; 56.75,45.161 56.75,40.8 v1(56.825,40.725) ; v3(60.425,23.7) 52.15,23.7 52.15,24.025 ; v1(64,30.5) 64,35.85 59.125,40.725 v1(56.825,40.725) ; v1@68.062,6.512 v1(68.075,6.5) 69.8,6.5 v1@76.4,13.1 ; 47.95,24.025 52.15,24.025 ; 52.15,24.025 52.212,24.087 52.212,27.462 v1(52.275,27.525) 56.825,32.075 56.825,37.875 ; 56.825,37.875 v1(56.825,40.725)
  Bottom Layer w0.5: v1(4.575,42.625) 8.525,38.675 v1(8.525,30.725) ; v1@4.637,42.687 v1@13.587,42.687 ; v1@8.7,24.925 v1@8.7,30.55 ; v1(8.85,18.9) 12.6,15.15 v1(14.45,15.15) ; v1@8.862,18.912 v1@8.862,24.738 ; J1.7@10.775,4.725 27.125,4.725 28.85,6.45 22.525,12.775 v1(22.525,15.15) ; v1@13.775,42.875 v1@13.775,51.35 ; v1@14.463,15.137 v1@22.412,15.137 ; 28.85,6.525 40.825,6.525 50.525,6.525 ; 50.537,6.512 v1@68.062,6.512
  Bottom Layer w1: v1(20.025,59.175) 42.735,59.175 v2(45.9,56.011) 56.75,45.161
  other v1: 61.85,19.3 52.875,20 45.9,56.011
NetC3_1: C3.1 FB1.2 J5.10 | length 18.4
  Top Layer w0.254: FB1.2@63.248,8.302 FB1.2 68.1,8.25 C3.1 68.125,8.299 C3.1@68.527,8.701
  Top Layer w0.381: C3.1 69.943,10.032 J5.10
NetC4_2: C4.2 U3.73 | length 8
  Top Layer w0.254: C4.2 24.269,17.576 26.345,15.5 U3.73
NetC5_2: C5.2 U3.49 | length 8.8
  Top Layer w0.254: U3.49 31.684,28.109 31.684,30.409 34.75,33.475 C5.2 C5.2@35.924,33.9
NetC6_1: C6.1 J1.2 SW1.1 SW1.2 U3.14 | length 75.6
  Top Layer w0.254: J1.2 4.16,16.52 4.16,37.635 SW1.2 v1(13.75,38.125) SW1.1@14.303,37.572 ; v1@33.75,21.025 v1(33.775,21) U3.14
  Bottom Layer w0.254: v1(13.75,38.125) 16.65,38.125 v1(33.775,21)
  other v1: 26.375,28.6
NetDS1_1: DS1.1 R5.1 | length 4.7
  Top Layer w0.254: DS1.1 14.825,30.75 R5.1
NetDS2_1: DS2.1 R6.1 | length 4.2
  Top Layer w0.254: DS2.1 R6.1
NetDS3_1: DS3.1 R7.1 | length 4.2
  Top Layer w0.254: DS3.1 15.125,18.925 R7.1
NetF1_1: F1.1 F1.3 J2.2 | length 19.2
  Top Layer w0.254: v2(45.9,52.475) J2.2@46.125,52.475
  Top Layer w1: J2.2@46.125,52.475 53.36,59.71 F1.3 F1.1
NetH1_1: H1.1 R1.2 | length 5.2
  Top Layer w0.254: R1.2 30.075,44.69 H1.1
NetH1_2: H1.2 J2.5 U1.6 | length 32
  Top Layer w0.254: U1.6 25.025,50.065 28.85,46.24 H1.2 31,41.225 33.95,41.225 44.132,51.407 v2(44.132,54.243)
NetH3_1: H3.1 U3.23 | length 9.5
  Top Layer w0.254: U3.23 44.784,25.509 46.284,25.509 48.339,27.564 48.339,28.474 H3.1@51.3,31.435
NetH3_2: H3.2 U3.24 | length 11.3
  Top Layer w0.254: U3.24 44.784,26.009 45.858,26.009 47.55,27.7 47.55,28.963 49.55,30.963 49.55,32.225 H3.2@51.3,33.975
NetJ1_4: J1.4 U3.72 | length 28.6
  Top Layer w0.254: J1.4 9.475,11.145 9.475,14.075 12,16.6 17.5,16.6 20.6,19.7 24.425,19.7 28.125,16 U3.72
NetJ1_6: J1.6 U3.76 | length 25.2
  Top Layer w0.254: J1.6 9.52,8.65 24.025,8.65 28.275,12.9 U3.76
NetJ1_8: J1.8 U3.89 | length 33.4
  Top Layer w0.254: J1.8 9.535,6.125 23.85,6.125 27.525,9.8 35.649,9.8 37.666,11.817 37.666,12.891 U3.89
NetJ2_4: J2.4 R1.1 U1.7 | length 20
  Top Layer w0.254: U1.7 29.84,51.335 R1.1 30.75,51.1 35.66,56.011 v2(42.364,56.011)
NetJ5_1: J5.1 U3.98 | length 45
  Top Layer w0.254: U3.98 v1(42.175,16.8) ; v1(77.025,23.525) 79.725,23.525 80,23.25 J5.1
  Bottom Layer w0.254: v1(42.175,16.8) 66.7,16.8 73.45,23.55 77,23.55 v1(77.025,23.525)
NetJ5_2: J5.2 U3.97 | length 47.6
  Top Layer w0.254: v1(40.275,17.75) 40.275,15.659 41.666,14.267 41.666,12.909 U3.97 ; v1(70.275,22) J5.2 J5.2@80.225,21.975
  Bottom Layer w0.254: v1(40.275,17.75) 40.287,17.762 44.284,17.762 44.771,17.275 64.775,17.275 69.5,22 v1(70.275,22)
NetJ5_3: J5.3 U3.4 | length 37.6
  Top Layer w0.254: U3.4 44.798,15.977 47.048,15.977 47.2,15.825 70.625,15.825 75.4,20.6 80.15,20.6 J5.3
NetJ5_4: J5.4 U3.5 | length 36.6
  Top Layer w0.254: U3.5 69.025,16.5 v1(71.45,18.925) ; v1(76.475,19.025) 80.175,19.025 80.225,18.975 J5.4
  Bottom Layer w0.381: v1(71.45,18.925) 71.5,18.975 76.425,18.975 v1(76.475,19.025)
NetJ5_5: J5.5 U3.3 | length 36.5
  Top Layer w0.254: U3.3 46.55,15.5 46.75,15.3 77.6,15.3 77.775,15.475 77.8,15.5 ; 77.825,15.5 77.8,15.5 ; J5.5 79.8,17.5 77.8,15.5
NetJ5_6: J5.6 U3.2 | length 36.1
  Top Layer w0.254: U3.2 44.798,14.977 46.173,14.977 46.45,14.7 78.5,14.7 79.8,16 J5.6
NetJ5_7: J5.7 U3.1 | length 35.8
  Top Layer w0.254: U3.1 45.15,14.125 79.875,14.125 J5.7
NetL1_1: L1.1 U4.7 | length 5.3
  Top Layer w0.254: U4.7 64.625,24.35 65.5,25.225 L1.1
NetR2_1: R2.1 U1.8 | length 7.4
  Top Layer w0.254: R2.1 22.975,57.844 23.876,56.943 23.876,52.803 24.074,52.605 U1.8
NetR5_2: R5.2 U3.55 | length 15.3
  Top Layer w0.254: R5.2 16.9,30.575 22.975,24.5 U3.55
NetR6_2: R6.2 U3.57 | length 13
  Top Layer w0.254: R6.2 17.2,24.6 17.698,24.102 17.848,24.102 18.45,23.5 U3.57
NetR7_2: R7.2 U3.59 | length 13.9
  Top Layer w0.254: R7.2 17.225,19.025 17.723,19.523 17.873,19.523 20.85,22.5 U3.59
NetU1_1: U1.1 U3.96 | length 61.9
  Top Layer w0.254: v1(15.875,43.9) 13.65,43.9 10.8,46.75 10.8,51.275 12.13,52.605 U1.1 ; v1(38.225,15.95) 39.342,15.95 41.166,14.125 41.166,12.909 U3.96
  Bottom Layer w0.254: v1(15.875,43.9) 16.45,43.9 38.225,22.125 v1(38.225,15.95)
NetU1_4: U1.4 U3.95 | length 46.5
  Top Layer w0.254: U1.4 18.875,39.275 19.025,39.125 v1(19.075,39.125) ; v1(35.975,15.975) 37.068,14.882 39.767,14.882 40.666,13.983 40.666,12.909 U3.95
  Bottom Layer w0.254: v1(19.075,39.125) 19.075,38.875 35.975,21.975 v1(35.975,15.975)
VCC_MCU: C1.1 C8.2 C9.2 C10.2 C11.2 C12.2 C13.1 C14.1 C15.1 C16.2 FB1.1 J1.1 L1.2 U1.3 U3.6 U3.11 U3.19 U3.21 U3.22 U3.28 U3.50 U3.75 U3.100 U4.6 | length 274.3
  Top Layer w0.254: J1.1@11.39,12.6 12.315,11.675 24.95,11.675 27.775,14.5 U3.75 U3.75@29.584,14.509 ; U1.3@19.375,50.065 U1.3 14.44,50.065 C1.1 14.1,48.025 17.6,44.525 17.6,38.5 18.375,37.725 29.325,37.725 31.175,35.875 U3.50 31.184,28.091 31.184,27.017 ; v1@28.875,8.151 32.749,8.151 32.75,8.15 32.752,8.152 41.8,8.152 41.825,8.127 ; C13.1 33.849,38.475 44.275,38.475 47.425,41.625 ; C9.2 41.203,30.854 41.203,30.297 42.175,29.325 U3.28 ; U3.100 43.175,10.623 42.629,10.077 42.602,10.077 42.227,9.702 C15.1@42.227,9.675 ; U3.11 46.825,19.5 47.275,19.95 48.626,19.95 49.475,19.101 49.475,19.027 49.877,18.625 C11.2 ; U3.19 46.425,23.5 47.276,22.649 C10.2 ; U3.21 46.8,24.5 49.45,27.15 C16.2@50.1,27.15 ; U3.22 46.575,25 49.125,27.55 C16.2@50.474,27.55 ; U4.6 64.675,23.85 65.5,23.025 L1.2 66.35,20.3 65.982,19.932 65.623,19.932 65.275,19.584 C8.2 67.25,19.225 68.65,20.625 68.65,43.975 62.025,50.6 56.4,50.6 47.425,41.625 ; FB1.1 61.252,8.102 41.85,8.102 41.825,8.127 ; 41.825,8.127 42.227,8.529 C15.1@42.227,9.675 ; C15.1@42.227,9.675 43.475,9.675 44.225,10.425 44.225,13.425 43.175,14.475 43.175,16.475 43.692,16.991 44.766,16.991 U3.6 46.2,17 46.35,17.15 52.276,17.15 52.374,17.248 52.448,17.248 52.85,17.65 C12.2 50.778,17.724 50.427,18.075 50.427,18.223 50.025,18.625 C11.2 ; 47.425,41.625 48.725,41.625 53.8,36.55 53.8,30.802 51.024,28.026 51.024,27.952 50.622,27.55 C16.2 50.548,23.723 49.95,23.125 49.552,23.125 49.15,22.723 C10.2 ; C10.2 49.15,22.575 49.552,22.173 49.626,22.173 49.951,21.848 C11.2
  Bottom Layer w0.254: v1(25.7,12.25) 25.889,12.061 25.889,11.511 v1(28.925,8.475) ; v1(40.5,31.325) 40.5,34.425 v1(44.075,38)
pads on no net: J1.3 J1.5 J2.1 J5.11 J5.12 U1.5 U3.7 U3.8 U3.9 U3.12 U3.13 U3.15 U3.16 U3.17 U3.18 U3.25 U3.26 U3.29 U3.30 U3.31 U3.32 U3.33 U3.34 U3.35 U3.36 U3.37 U3.38 U3.39 U3.40 U3.41 U3.42 U3.43 U3.44 U3.45 U3.46 U3.47 U3.48 U3.51 U3.52 U3.53 U3.54 U3.56 U3.58 U3.60 U3.61 U3.62 U3.63 U3.64 U3.65 U3.66 U3.67 U3.68 U3.69 U3.70 U3.71 U3.77 U3.78 U3.79 U3.80 U3.81 U3.82 U3.83 U3.84 U3.85 U3.86 U3.87 U3.88 U3.90 U3.91 U3.92 U3.93
copper on no net:
  other v2: 42.364,52.475

## Polygon pours and split planes (outlines as drawn)
GND on Bottom Layer "Bottom Layer-GND 3" (solid, remove dead copper, pour order 8): 39.806,45.05 12.6,45.05 12.6,64.225 39.893,64.225
GND on Bottom Layer "Bottom Layer-GND 1" (solid, pour order 6): 45.225,29.4 88.444,29.4 88.454,61.125 45.225,61.125
GND on Bottom Layer "Bottom Layer-GND 2" (solid, pour order 4): 46.05,42.194 46.05,17.75 66.7,17.75 66.7,42.256
GND on Bottom Layer "Bottom Layer-GND" (solid, pour order 2): 12.594,60.925 29.7,60.925 29.7,45.25 12.594,45.25
no net on Bottom Layer "Bottom Layer-No Net" (solid, pour order 0): 72.325,115.425

## Silkscreen, mask and mechanical layers (free items; w line width, h text height)
Top Overlay:
  drawing of 75 lines, arcs and shapes, not listed
  text "Designed by Markus Schmid" at 66,47.5 h0.8
  text "Andrew was here" at 66,45.5 h0.8
  text "Matt was here too" at 66,43.5 h0.8
  text "12/16/2019 Revision II" at 66,41.5 h0.8
  text "GND" at 53.5,35.5 h0.9
  text "UART RX" at 53.5,33 h0.9
  text "UART TX" at 53.475,30.6 h0.9
  text "VCC" at 12.825,12.075 h0.8
  text "NRST" at 3.525,11.975 h0.8
  text "SWDIO" at 2.925,9.55 h0.8
  text "SWDCLK" at 1.95,6.875 h0.8
  text "GND" at 12.65,4.425 h0.8
  text "SWO" at 4.2,4.4 h0.8